# EAGLE board wrist_watch_v1 (EAGLE 6.1)
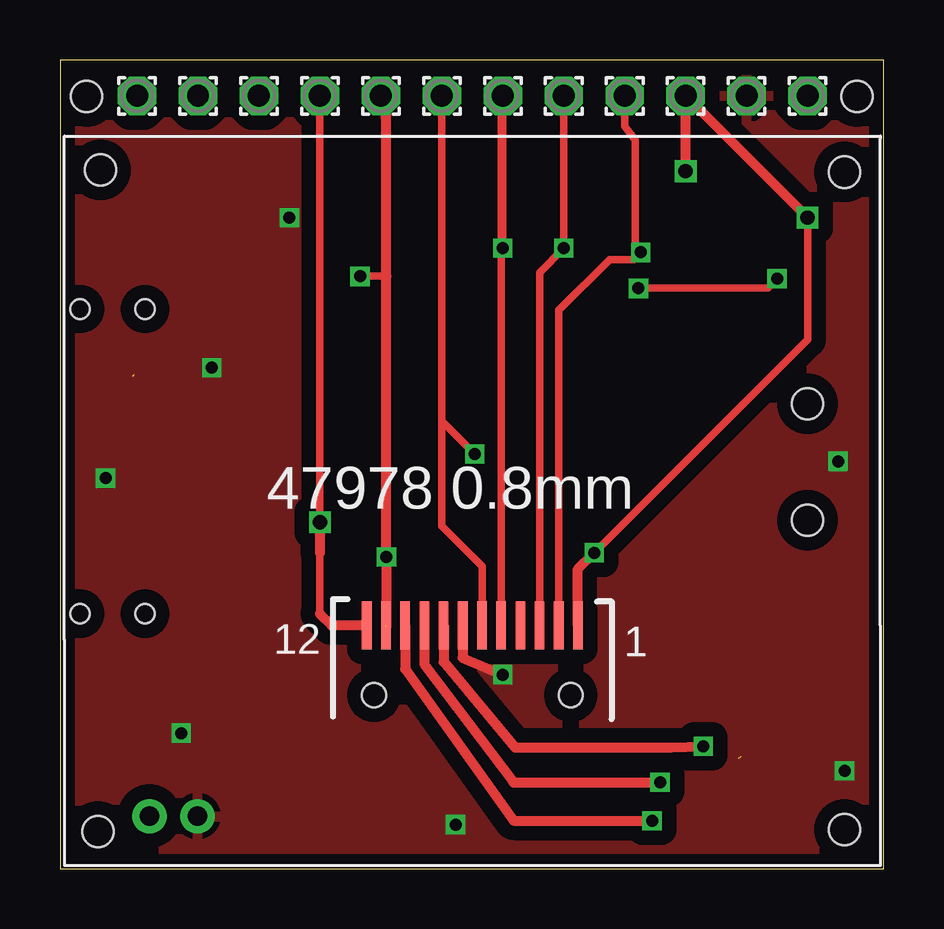
[diagram p0: board, top side]
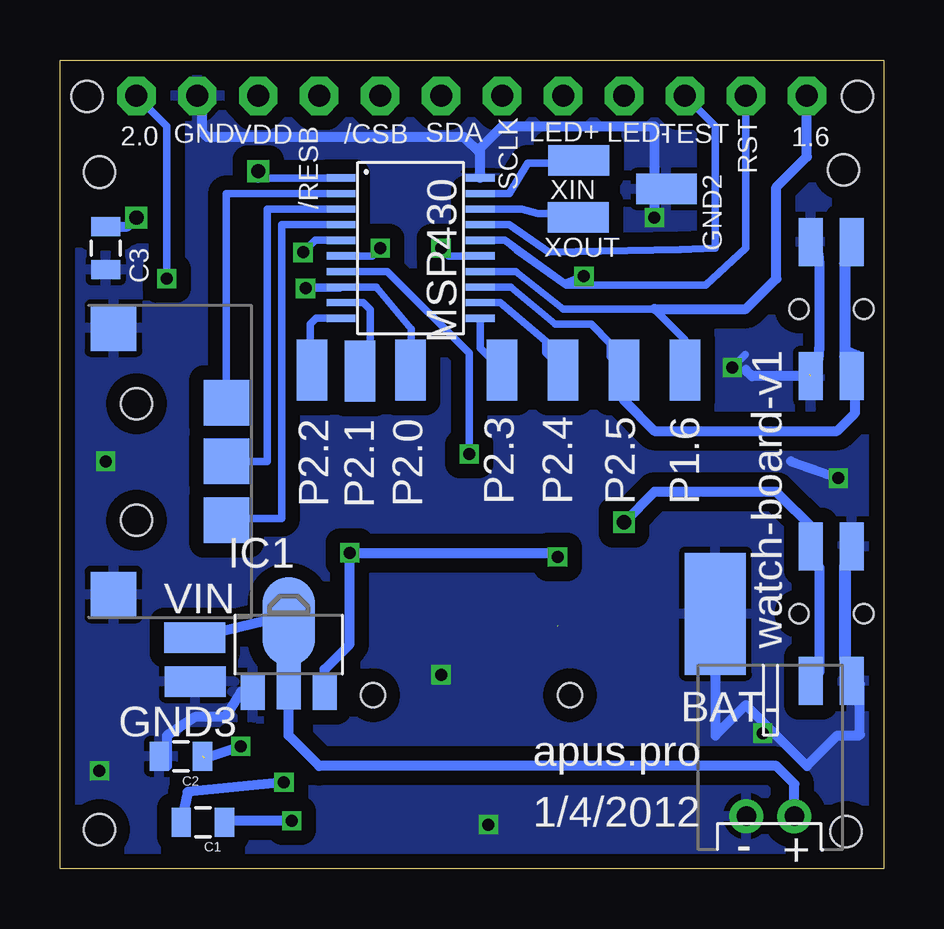
[diagram p1: board, bottom side, seen from below]

Size 34.33 x 33.72 mm. Coordinates in mm from the lower left corner, seen from the top.
Outline: 0,0 34.33,0 34.33,33.72 0,33.72 0,0
Copper layers (1*16): Top 0.035mm / dielectric 1.5mm / Bottom 0.035mm
Design rules: minimum track width 6mil, minimum drill 12mil, track to track 6mil, track to pad 6mil, pad to pad 6mil, via to via 6mil, smd to smd 0mil, copper to edge 10mil, drill to drill 10mil, minimum pad ring 10mil, minimum via ring 6mil, stop-mask expansion 2mil, vias tented up to drill 100mil, thermal gap 10mil
Holes 1.3 mm at 1.1,32.2 33.2,32.2

## Footprints (pad centres in the part's own frame; a part is rotated, then mirrored left to right if it is on the bottom)
1,6/0,9 = drill 0.914 pad 1.6 octagon: 1 0,0
SMD2,54-5,08 = smd 2.54 x 5.08: 1 0,0
0805 = smd 0.8 x 1.2: 1 -0.9,0; 2 0.9,0
JST-PH-2-THM-RA = drill 0.8 pad 1.422: 1 1,0; 2 -1,0
SMD1,27-2,54 = smd 1.27 x 2.54: 1 0,0
SOT89 = smd 1 x 1.5: 1 -1.499,-1.981; 3 1.499,-1.981 | smd 1 x 2: 2 0,-1.727 | smd 2.2 x 3.7: 2@1 0,0.94
PW20 = smd 0.3 x 1.2: 1 -2.925,-2.9; 2 -2.275,-2.9; 3 -1.625,-2.9; 4 -0.975,-2.9; 5 -0.325,-2.9; 6 0.325,-2.9; 7 0.975,-2.9; 8 1.625,-2.9; 9 2.275,-2.9; 10 2.925,-2.9; 11 2.925,2.9; 12 2.275,2.9; 13 1.625,2.9; 14 0.975,2.9; 15 0.325,2.9; 16 -0.325,2.9; 17 -0.975,2.9; 18 -1.625,2.9; 19 -2.275,2.9; 20 -2.925,2.9
PE9665WRF = smd 0.4 x 2: 1 4.4,0; 2 3.6,0; 3 2.8,0; 4 2,0; 5 1.2,0; 6 0.4,0; 7 -0.4,0; 8 -1.2,0; 9 -2,0; 10 -2.8,0; 11 -3.6,0; 12 -4.4,0 | hole 1: -4.1,-2.9; 4.1,-2.9 | hole 1.3: -15.5,19; 15.5,18.9; 15.5,-8.5; -15.6,-8.6
MCPTCF-V = smd 2 x 1: 1 -2.8,0.9; 2 -2.8,-0.8; 3 2.8,0.9; 4 2.8,-0.8 | hole 0.8: 0,-1.3; 0,1.4
MCPL3-BC-V = smd 1.9 x 1.9: 1 -2.45,-3.75; 2 2.45,-3.75; C 5.55,0.95; G -5.55,0.95; PUSH 0,-3.75 | hole 1.3: -2.45,0; 2.4,0

## Placement (x,y rotation side)
1.6  [1,6/0,9]  3.21,32.22 0 top
2.0  [1,6/0,9]  31.15,32.22 0 top
/CSB  [1,6/0,9]  20.99,32.22 0 top
/RESB  [1,6/0,9]  23.53,32.22 0 top
BAT-  [SMD2,54-5,08]  7.02,10.63 0 bottom
C1  [0805]  28.38,1.94 180 bottom
C2  [0805]  29.29,4.68 180 bottom
C3  [0805]  32.42,25.87 90 bottom
CN1  [JST-PH-2-THM-RA]  4.73,2.19 0 bottom
GND  [1,6/0,9]  28.61,32.22 0 top
GND2  [SMD1,27-2,54]  9.06,28.34 90 bottom
GND3  [SMD1,27-2,54]  28.69,7.8 270 bottom
IC1  MCP170312MB  [SOT89]  24.8,9.36 0 bottom
LED+  [1,6/0,9]  13.37,32.22 0 top
LED-  [1,6/0,9]  10.83,32.22 0 top
MSP430  [PW20]  19.72,25.87 270 bottom
P1.6  [SMD1,27-2,54]  8.29,20.79 0 bottom
P2.0  [SMD1,27-2,54]  19.72,20.79 0 bottom
P2.1  [SMD1,27-2,54]  21.83,20.75 0 bottom
P2.2  [SMD1,27-2,54]  23.83,20.79 0 bottom
P2.3  [SMD1,27-2,54]  15.91,20.79 0 bottom
P2.4  [SMD1,27-2,54]  13.37,20.79 0 bottom
P2.5  [SMD1,27-2,54]  10.83,20.79 0 bottom
RST  [1,6/0,9]  5.75,32.22 0 top
SCLK  [1,6/0,9]  15.91,32.22 0 top
SDA  [1,6/0,9]  18.45,32.22 0 top
TEST  [1,6/0,9]  8.29,32.22 0 top
U$1  PE9665WRFPE9665WRF-WHOLE  [PE9665WRF]  17.18,10.14 0 top
U$2  MCPTCF-V  [MCPTCF-V]  2.14,10.63 90 bottom
U$3  MCPL3-BC-V  [MCPL3-BC-V]  31.15,16.98 90 bottom
U$4  MCPTCF-V  [MCPTCF-V]  2.24,23.33 270 bottom
VDD  [1,6/0,9]  26.07,32.22 0 top
VIN  [SMD1,27-2,54]  28.71,9.63 270 bottom
XIN  [SMD1,27-2,54]  12.72,29.53 90 bottom
XOUT  [SMD1,27-2,54]  12.73,27.16 90 bottom

## Library data of the parts
1.6 2.0 /CSB /RESB BAT- GND GND2 GND3 LED+ LED- P1.6 P2.0 P2.1-P2.5 RST SCLK SDA TEST VDD VIN XIN XOUT = wirepad
C1-C3 = SparkFun-Passives
CN1 = adafruit
IC1 = linear
MSP430 = TI_MSP430_v16
U$1-U$4 = apus-spidisplay

## Nets
C2: C2.1 U$1.8
GND: BAT-.1 C2.2 C3.1 CN1.2 GND2.1 GND3.1 GND.1 IC1.1 MSP430.20 U$1.7 U$2.2 U$2.4 U$3.C U$3.G U$4.2 U$4.4
LED-: LED-.1 U$1.12 U$2.1 U$2.3
N$1: C1.1 U$1.10
N$2: C1.2 U$1.9
N$3: MSP430.19 XIN.1
N$4: MSP430.3 U$3.PUSH
N$5: MSP430.17 TEST.1
N$6: MSP430.18 XOUT.1
N$7: MSP430.7 SCLK.1 U$1.6
N$8: MSP430.15 SDA.1 U$1.5
N$9: /CSB.1 MSP430.6 U$1.3
N$10: /RESB.1 MSP430.5 U$1.2
N$12: MSP430.4 U$3.1
N$13: 1.6.1 MSP430.14 P1.6.1
N$14: MSP430.2 U$3.2
N$15: MSP430.13 P2.5.1 U$4.1 U$4.3
N$17: MSP430.12 P2.4.1
N$18: MSP430.11 P2.3.1
N$20: MSP430.9 P2.1.1
N$21: MSP430.10 P2.2.1
N$22: 2.0.1 MSP430.8 P2.0.1
N$23: CN1.1 IC1.2@1 VIN.1
VDD: C3.2 IC1.3 LED+.1 MSP430.1 MSP430.16 RST.1 U$1.1 U$1.11 VDD.1

## Tracks (layer width: path | path; a pad name or v marks a point on that pad's centre or on a via)
C2  (via drill 0.5)  (1 unrouted)
  Top 0.406: U$1.8 15.98,8.62 18.95,5.05 25.45,5.05 v26.8,5.1
  Bottom 0.406: v26.8,5.1 28.29,4.6 28.61,4.28
GND  (via drill 0.5)  (1 unrouted)
  Top 0.406: U$1.7 16.78,8.79 v18.45,8.09
  Bottom 0.305: v6.32,20.89 5.77,21.44
  Bottom 0.406: GND.1 28.4,32.01 28.4,30.7 28.2,30.5 17.5,30.5 16.82,29.82 MSP430.20 16.82,30.04 15.91,30.95 9.56,30.95 v9.56,27.14 | 3.87,16.98 v1.9,16.28 | U$2.4 1.14,12.96 1.6,12.5 1.6,8.29 U$2.2 1,7.69 1,5.6 1.05,5.55 1.94,5.55 3.21,4.28 5.75,6.82 7.02,5.55 BAT-.1 | U$4.2 2.74,25.64 2.7,25.2 2.7,21.7 2.8,20.7 3.1,20.6 2.8,20.5 2.92,20.5 3.21,20.79 | U$4.4 5.49,20.53 5.75,20.79 | IC1.1 26.78,7.38 27.44,6.32 28.71,6.32 29.88,5.55 29.88,4.28
  other vias: 32.42,16.98 5.05,5.65 16.48,1.84 32.69,4.08
  pour Top (isolate 0.61): 0.67,33.49 33.69,33.49 33.69,0.47 0.67,0.47
  pour Bottom (isolate 0.61): 0.67,33.49 33.69,33.49 33.69,0.47 0.67,0.47
LED-  (via drill 0.6)
  Top 0.305: LED-.1 v10.83,14.44 | 10.83,13.17 10.83,10.63
  Top 0.406: U$1.12 11.32,10.14 10.83,10.63 | v10.83,14.44 10.83,13.17
  Bottom 0.406: v10.83,14.44 9.56,15.71 4.48,15.71 2.84,14.07 U$2.3 2.84,12.64 2.7,12.6 2.7,8.17 U$2.1
N$1  (via drill 0.5)
  Top 0.406: U$1.10 14.38,8.32 18.9,2 v24.67,2
  Bottom 0.406: v24.67,2 27.51,2 C1.1
N$2  (via drill 0.5)
  Top 0.406: U$1.9 15.18,8.52 18.9,3.6 v25,3.6
  Bottom 0.406: v25,3.6 29.01,3.2 C1.2
N$3
  Bottom 0.305: MSP430.19 15.6,28.14 14.84,29.41 13.44,29.41 XIN.1
N$4
  Bottom 0.305: MSP430.3 25.7,27.5 25.7,16.98 U$3.PUSH
N$5
  Bottom 0.305: TEST.1 7.02,30.95 7.02,25.87 8.49,25.8 13.97,25.7 15.62,26.84 MSP430.17
N$6
  Bottom 0.305: MSP430.18 15.1,27.5 14.4,27.3 13.07,27.3 XOUT.1
N$7  (via drill 0.5)
  Top 0.305: U$1.6 17.6,10.16 17.6,12.6 15.91,14.29 SCLK.1 15.91,18.66 v17.28,17.29
  Bottom 0.305: MSP430.7 20.68,24.89 17.28,21.49 v17.28,17.29
N$8  (via drill 0.5)
  Top 0.305: U$1.5 18.38,32.15 SDA.1 v18.45,25.87
  Bottom 0.305: MSP430.15 18.12,25.54 v18.45,25.87
N$9  (via drill 0.5)
  Top 0.305: U$1.3 19.98,24.86 v20.99,25.87 /CSB.1
  Bottom 0.305: MSP430.6 21.31,25.54 v20.99,25.87
N$10  (via drill 0.5)
  Top 0.305: /RESB.1 23.53,30.95 23.96,30.38 23.96,25.94 v24.2,25.7 23.9,25.4 22.9,25.4 20.78,23.28 20.78,12.96 20.78,12.4 U$1.2
  Bottom 0.305: v24.2,25.7 23.7,26.2 22.6,26.2 MSP430.5
N$12
  Bottom 0.305: MSP430.4 25.1,26.84 25.1,14.6 27.34,14.6 27.34,14.44 27.4,14.5 U$3.1
N$13
  Bottom 0.305: MSP430.14 15.34,24.89 13.37,23.33 9.56,23.33 8.29,22.06 P1.6.1
  Bottom 0.406: 9.56,23.33 5.75,23.33 4.48,24.6 4.48,28.41 3.21,29.68 1.6.1
N$14
  Bottom 0.305: MSP430.2 27.4,28.14 U$3.2
N$15
  Bottom 0.305: MSP430.13 15.54,24.25 13.7,22.7 12.2,22.7 11.4,21.9 11.4,21.36 P2.5.1
  Bottom 0.406: P2.5.1 10.83,19.52 9.56,18.25 1.95,18.25 1.2,19 1.2,20.3 1.1,20.4 1.1,20.79 | 1.1,20.79 1.1,21.4 1.6,21.6 1.6,25.07 U$4.1 | U$4.3 1.04,20.73 1.1,20.79
N$17
  Bottom 0.305: MSP430.12 15.99,23.59 14.1,22 14.1,21.52 P2.4.1
N$18
  Bottom 0.305: MSP430.11 16.82,21.7 P2.3.1
N$20
  Bottom 0.305: MSP430.9 21.7,23.59 21.4,23.3 21.4,21.18 P2.1.1
N$21
  Bottom 0.305: MSP430.10 23.65,22.95 23.9,22.7 23.9,20.86 P2.2.1
N$22  (via drill 0.5)
  Top 0.305: v29.88,24.6 29.48,24.2 v24.1,24.2
  Bottom 0.305: MSP430.8 21.14,24.25 19.7,22.5 19.7,20.81 P2.0.1 | MSP430.8 22.66,24.2 v24.1,24.2 24.05,24.25 MSP430.8 | 2.0.1 29.88,30.95 v29.88,24.6
N$23
  Bottom 0.406: VIN.1 25.84,10.3 IC1.2@1 24.8,5.55 23.53,4.28 4.48,4.28 3.73,3.53 CN1.1
VDD  (via drill 0.5, 0.6)  (1 unrouted)
  Top 0.305: v22.26,13.17 31.15,22.06 v31.15,27.14 | v12.5,24.7 13.6,24.7 13.5,32.2 LED+.1
  Top 0.406: U$1.1 21.58,12.49 v22.26,13.17 | 13.6,10.1 v13.6,13 13.6,24.7 13.6,31.99 LED+.1 | v26.07,29.08 VDD.1 v31.15,27.14
  Bottom 0.305: MSP430.1 26.07,28.79 | MSP430.16 15.79,26.2 | RST.1 5.75,25.87 7.42,24.33 13.24,24.33 15.29,25.79 15.79,26.2 | 15.79,26.2 13.3,24.4 v12.5,24.7
  Bottom 0.406: v13.6,13 13.77,13.17 v22.26,13.17 22.26,9.36 23.3,8.32 IC1.3 23.53,7.38 | 26.07,28.79 v26.07,29.08 | C3.2 31.52,26.77 v31.15,27.14

## Text on the board
tPlace: 47978 0.8mm
bPlace: watch-board-v1 | apus.pro | 1/4/2012